# EAGLE board PCB v35 (EAGLE 9.7.0)
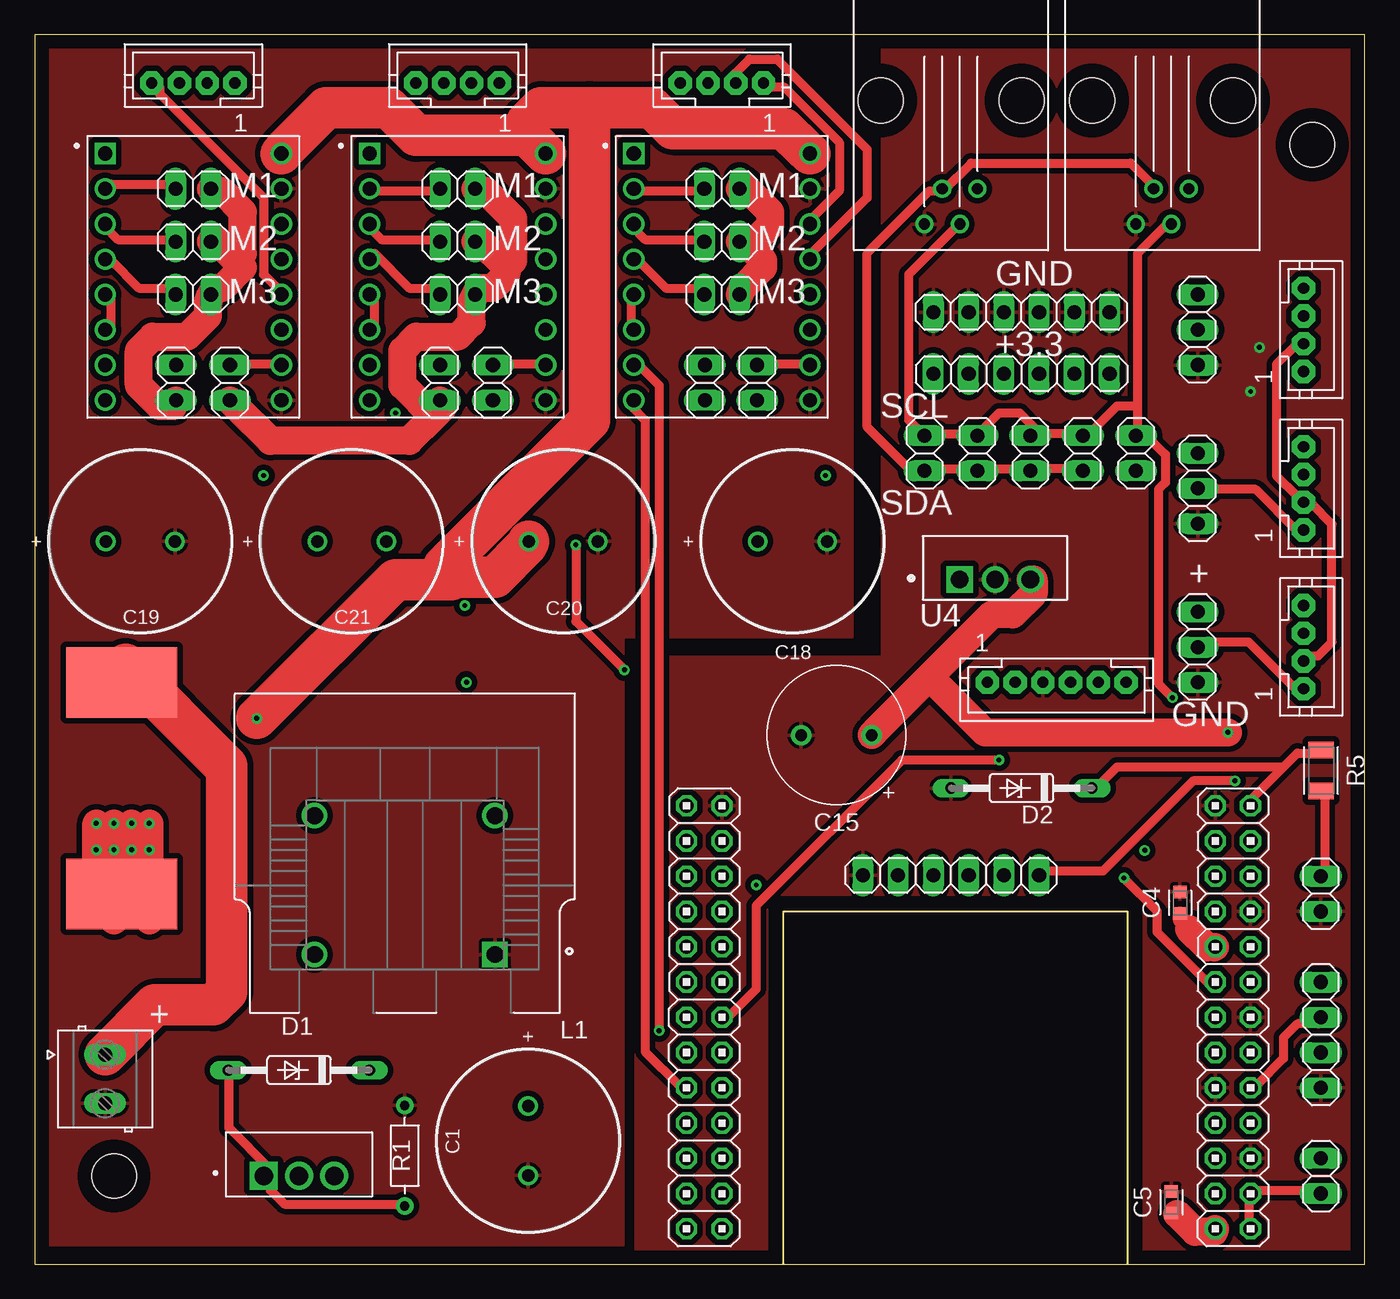
[diagram p0: board, top side]
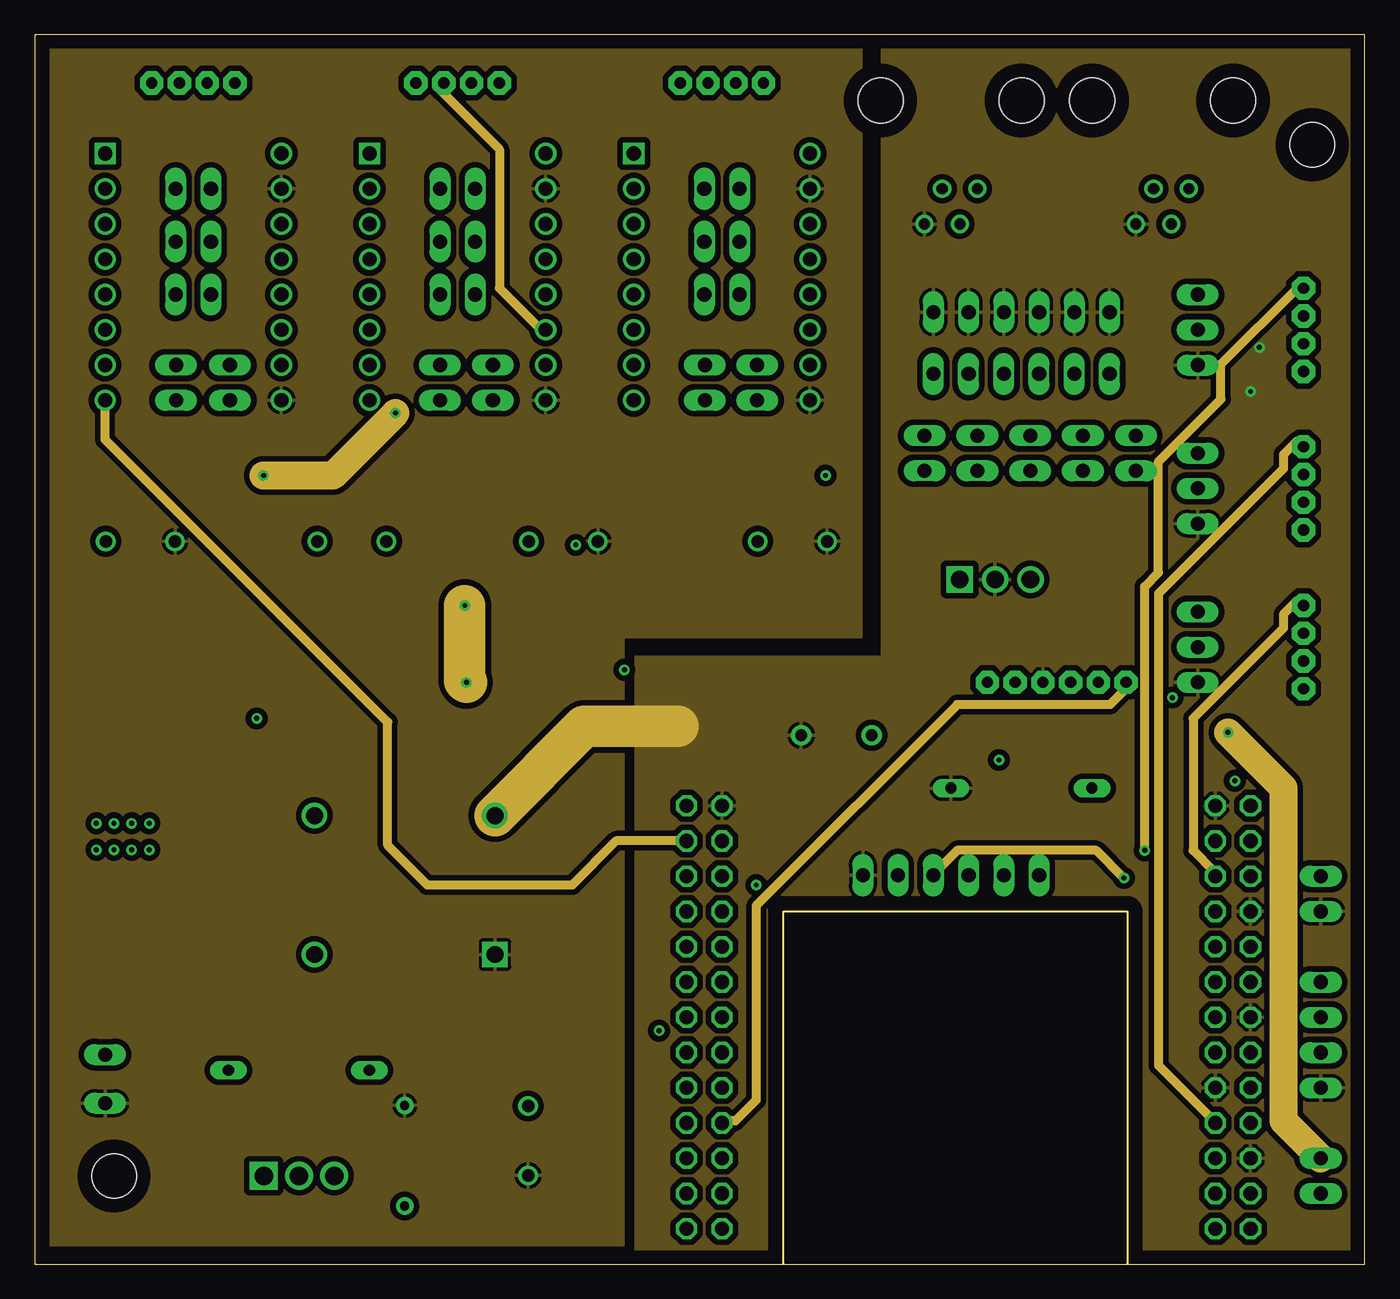
[diagram p1: board, inner layer Route2]
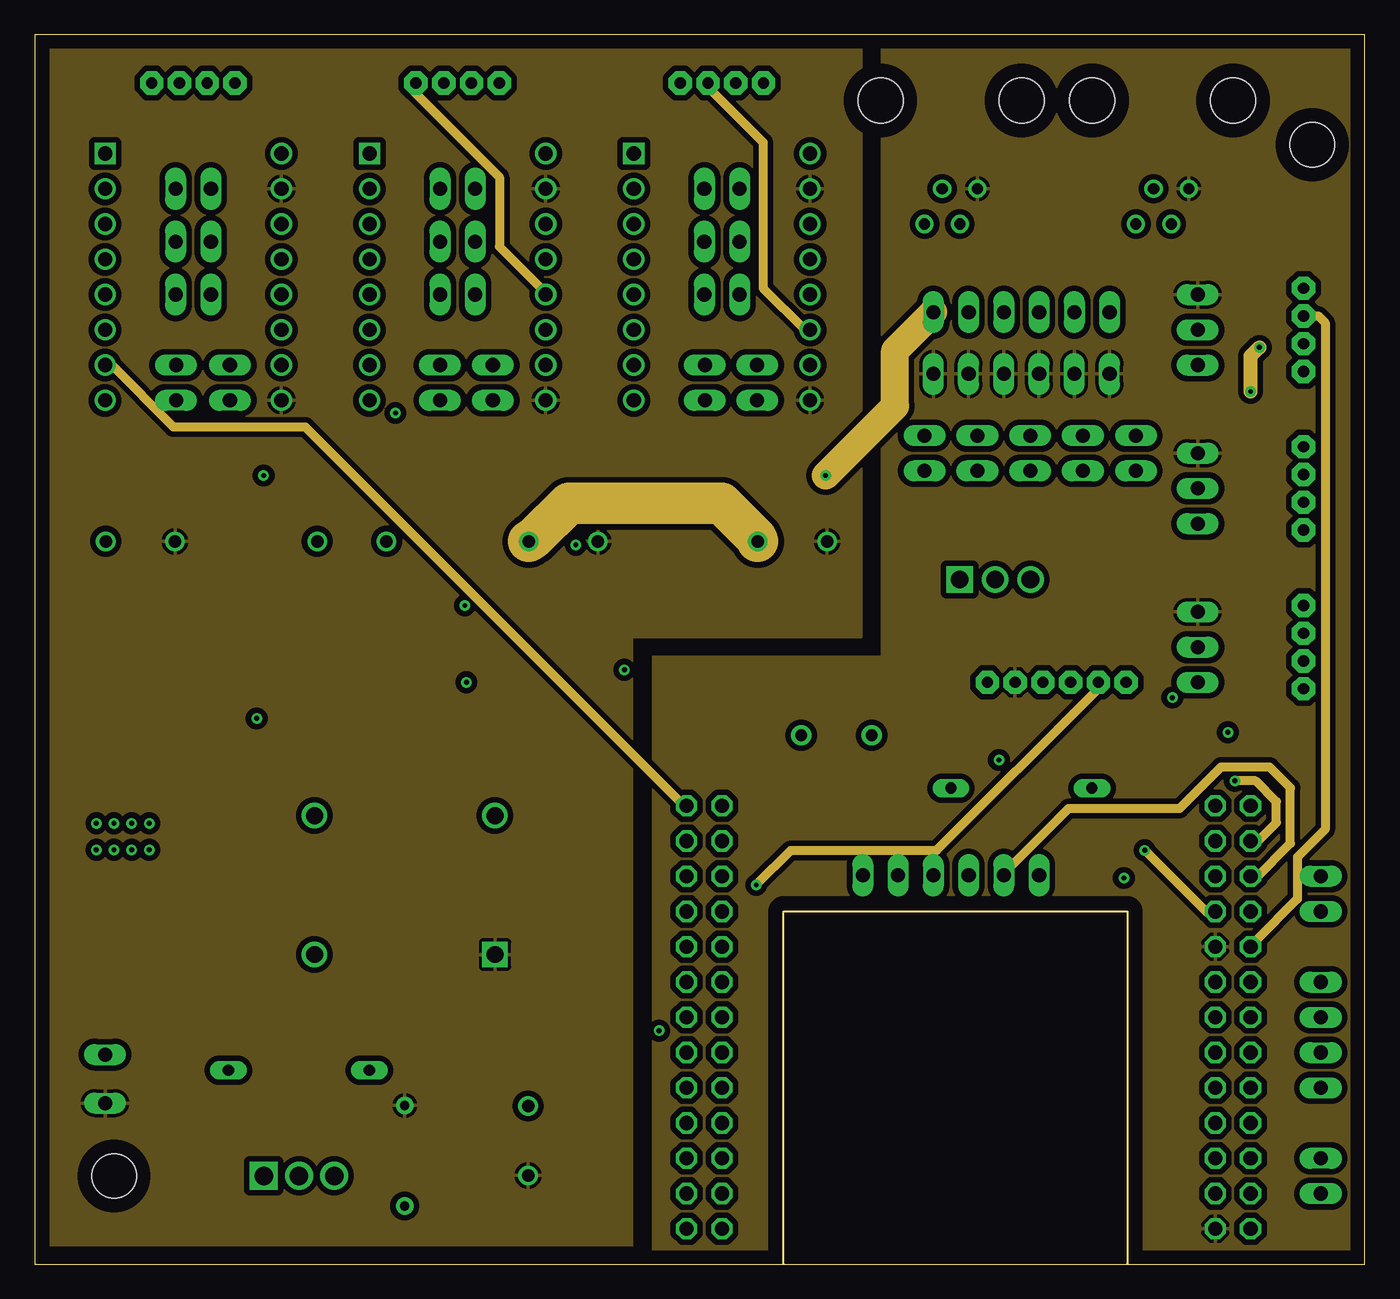
[diagram p2: board, inner layer Route15]
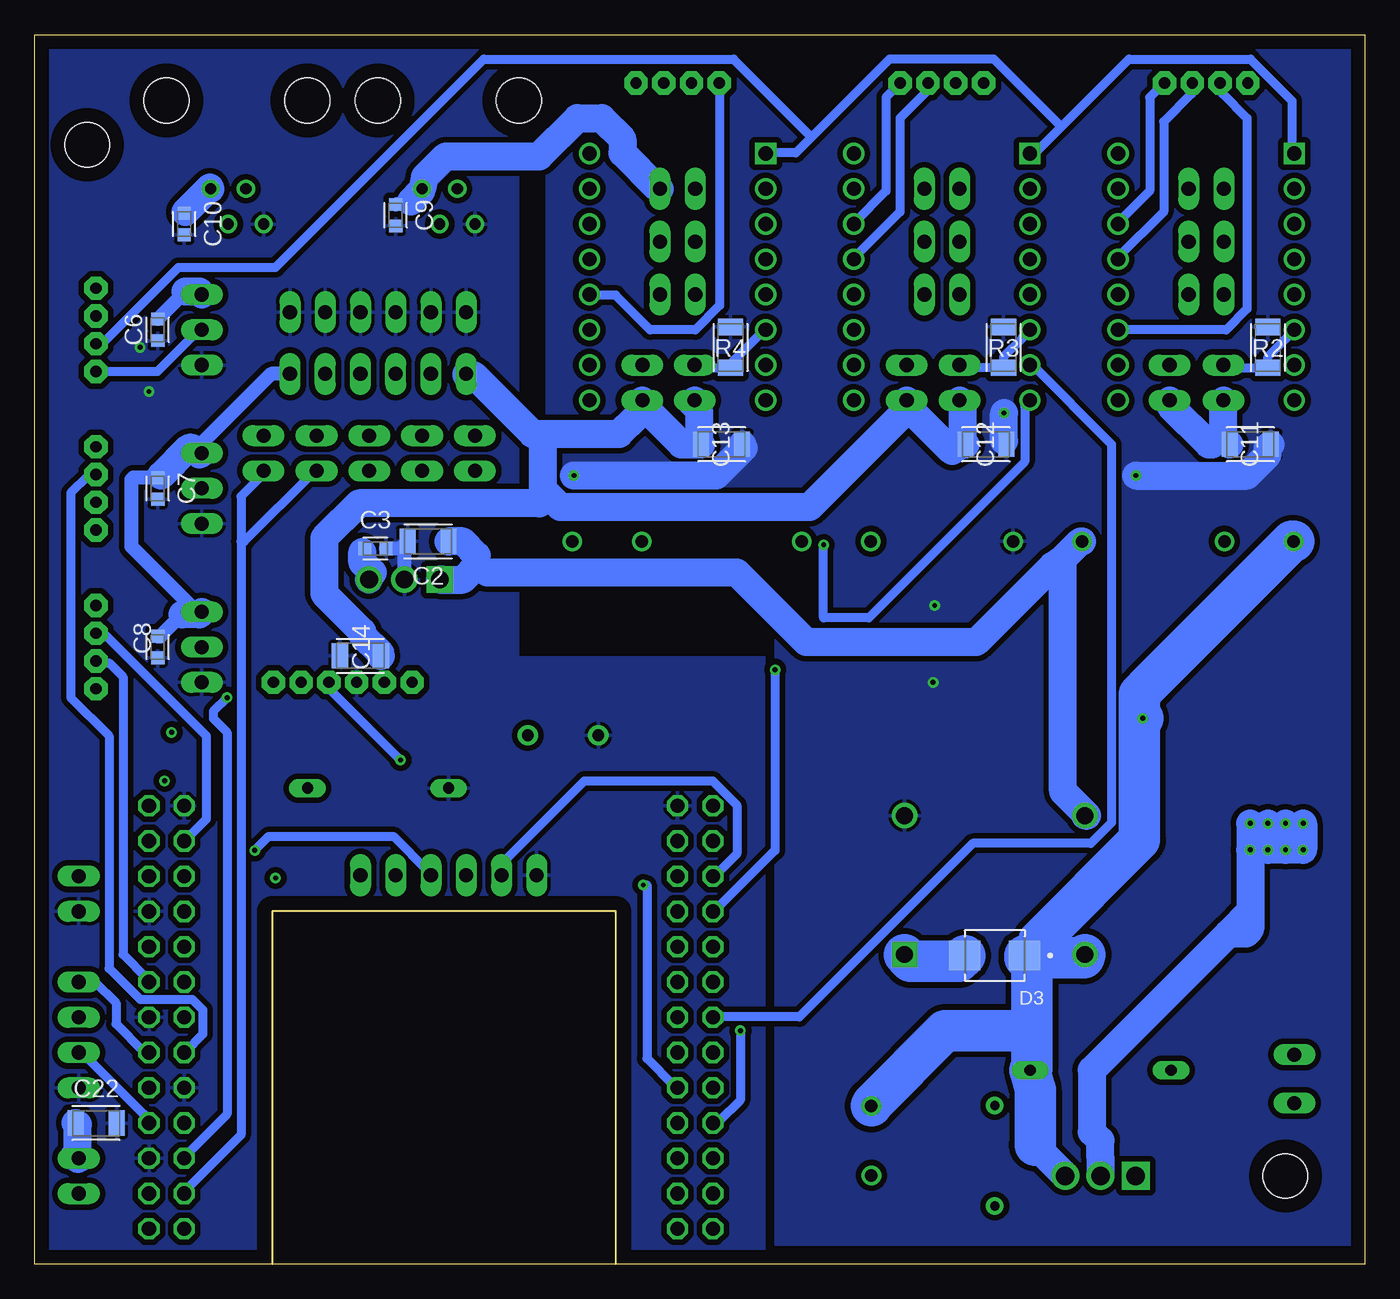
[diagram p3: board, bottom side, seen from below]

Size 95.86 x 88.57 mm. Coordinates in mm from the lower left corner, seen from the top.
Outline: 53.98,0 0,0 0,88.57 95.86,88.57 95.86,0 78.74,0
Outline: 53.98,0 78.74,0
Outline: 53.98,0 53.98,25.4 78.74,25.4 78.74,0
Copper layers (1+2*15+16): Top 0.035mm / dielectric 1.5mm / Route2 0.035mm / dielectric 0.15mm / Route15 0.035mm / dielectric 0.2mm / Bottom 0.035mm
Design rules "Fusion Electronics Design Rules *": minimum track width 6mil, minimum drill 0.35mm, track to track 6mil, track to pad 6mil, pad to pad 6mil, via to via 6mil, smd to smd 6mil, copper to edge 40mil, drill to drill 6mil, minimum pad ring 10mil, minimum via ring 8mil, stop-mask expansion 4mil, vias tented up to drill 0mil, thermal gap 10mil
Net classes: 0 default: width 0.318 mm; 1 power: width 2 mm; 2 lidlpower: width 1 mm
Holes 3.2 mm at 92.08,80.64 5.72,6.35

## Footprints (pad centres in the part's own frame; a part is rotated, then mirrored left to right if it is on the bottom)
WCAP-AT1H_13X20(DXL) = drill 0.9: 1 2.5,0; 2 -2.5,0
CAPC3216X135 = smd 1.165 x 1.815: 1 -1.475,0; 2 1.475,0
CAPC1608X85 = smd 0.921 x 0.97: 1 -0.775,0; 2 0.775,0
CAPPRD508W65D1000H1100B = drill 0.85 pad 1.45: 1 -2.54,0; 2 2.54,0
DO35Z10 = drill 0.813 long: A 5.08,0; C -5.08,0
DIOM4336X265N = smd 2.28 x 2.12: A 2.165,0; C -2.165,0
RJ11 = drill 0.8: 1 -3.81,-2.54; 2 -6.35,-1.27; 3 -3.81,0; 4 -6.35,1.27 | hole 3.25: 2.54,-5.715; 2.54,4.445
2X13 = drill 1.016 octagon: 1 -15.24,-1.27; 2 -15.24,1.27; 3 -12.7,-1.27; 4 -12.7,1.27; 5 -10.16,-1.27; 6 -10.16,1.27; 7 -7.62,-1.27; 8 -7.62,1.27; 9 -5.08,-1.27; 10 -5.08,1.27; 11 -2.54,-1.27; 12 -2.54,1.27; 13 0,-1.27; 14 0,1.27; 15 2.54,-1.27; 16 2.54,1.27; 17 5.08,-1.27; 18 5.08,1.27; 19 7.62,-1.27; 20 7.62,1.27; 21 10.16,-1.27; 22 10.16,1.27; 23 12.7,-1.27; 24 12.7,1.27; 25 15.24,-1.27; 26 15.24,1.27
1X02 = drill 1.016 long: 1 -1.27,0; 2 1.27,0
1X06 = drill 1.016 long: 1 -6.35,0; 2 -3.81,0; 3 -1.27,0; 4 1.27,0; 5 3.81,0; 6 6.35,0
1X03 = drill 1.016 long: 1 -2.54,0; 2 0,0; 3 2.54,0
1X04 = drill 1.016 long: 1 -3.81,0; 2 -1.27,0; 3 1.27,0; 4 3.81,0
IND_UT2020-001 = drill 1.219 square: 1 -6.502,5.004 | drill 1.219: 2 -6.502,-5.004; 3 6.502,-5.004; 4 6.502,5.004
JST-PH4 = drill 0.813 pad 1.676 octagon: 1 3,0; 2 1,0; 3 -1,0; 4 -3,0
JST-PH6 = drill 0.813 pad 1.676 octagon: 1 5,0; 2 3,0; 3 1,0; 4 -1,0; 5 -3,0; 6 -5,0
TO254P1052X465X1989-3 = drill 1.34 pad 2.01 square: 1 0,0 | drill 1.34 pad 2.01: 2 2.54,0; 3 5.08,0
RESAD724W46L381D178B = drill 0.66 pad 1.26: 1 -3.62,0; 2 3.62,0
RESC3216X70 = smd 1.165 x 1.815: 1 -1.475,0; 2 1.475,0
MODULE_A4988_STEPPER_MOTOR_DRIVER_CARRIER = drill 1.02 square: 1 -6.35,8.89 | drill 1.02: 2 -6.35,6.35; 3 -6.35,3.81; 4 -6.35,1.27; 5 -6.35,-1.27; 6 -6.35,-3.81; 7 -6.35,-6.35; 8 -6.35,-8.89; 9 6.35,-8.89; 10 6.35,-6.35; 11 6.35,-3.81; 12 6.35,-1.27; 13 6.35,1.27; 14 6.35,3.81; 15 6.35,6.35; 16 6.35,8.89
TO255P1040X460X2890-3 = drill 1.27 pad 1.91 square: 1 -2.55,-0.85 | drill 1.27 pad 1.91: 2 0,-0.85; 3 2.55,-0.85
POJ = smd 8 x 5.08: P$3 -1.27,7.62; P$4 -1.27,-7.62
DG350-3.5-02P = drill 1 long: 1 -1.75,0; 2 1.75,0

## Placement (x,y rotation side)
C1  3300 µF  [WCAP-AT1H_13X20(DXL)]  35.56,8.89 90 top
C2  [CAPC3216X135]  67.51,52.07 180 bottom
C3  [CAPC1608X85]  71.32,51.54 0 bottom
C4  [CAPC1608X85]  82.55,26.04 90 top
C5  [CAPC1608X85]  81.92,4.45 90 top
C6  [CAPC1608X85]  87,67.31 270 bottom
C7  [CAPC1608X85]  87,55.88 270 bottom
C8  [CAPC1608X85]  87,44.45 270 bottom
C9  [CAPC1608X85]  69.85,75.56 270 bottom
C10  [CAPC1608X85]  85.09,74.93 270 bottom
C11  [CAPC3216X135]  8.26,59.05 0 bottom
C12  [CAPC3216X135]  27.3,59.05 0 bottom
C13  [CAPC3216X135]  46.35,59.05 0 bottom
C14  [CAPC3216X135]  72.39,43.82 180 bottom
C15  [CAPPRD508W65D1000H1100B]  57.78,38.1 180 top
C18  2200 µF  [WCAP-AT1H_13X20(DXL)]  54.61,52.07 180 top
C19  2200 µF  [WCAP-AT1H_13X20(DXL)]  7.62,52.07 180 top
C20  2200 µF  [WCAP-AT1H_13X20(DXL)]  38.1,52.07 180 top
C21  3300 µF  [WCAP-AT1H_13X20(DXL)]  22.86,52.07 180 top
C22  [CAPC3216X135]  91.44,10.16 0 bottom
D1  BZX55  [DO35Z10]  19.05,13.97 180 top
D2  BZX55  [DO35Z10]  71.12,34.29 180 top
D3  SMBJ11A  [DIOM4336X265N]  26.67,22.22 180 bottom
J1  RJ11  [RJ11]  80.64,81.28 90 top
J3  RJ11  [RJ11]  65.41,81.28 90 top
JP1  [2X13]  48.26,17.78 270 top
JP2  [2X13]  86.36,17.78 270 top
JP3  [1X02]  64.14,58.42 90 top
JP4  [1X02]  67.94,58.42 90 top
JP5  [1X02]  71.75,58.42 90 top
JP6  [1X02]  75.54,58.42 90 top
JP7  [1X02]  79.38,58.42 90 top
JP8  [1X02]  49.53,77.47 180 top
JP9  [1X02]  49.53,73.66 180 top
JP10  [1X02]  49.53,69.85 180 top
JP11  [1X02]  11.43,77.47 180 top
JP12  [1X02]  11.43,73.66 180 top
JP13  [1X02]  11.43,69.85 180 top
JP14  [1X02]  30.48,77.47 180 top
JP15  [1X02]  30.48,73.66 180 top
JP16  [1X02]  30.48,69.85 180 top
JP17  [1X06]  71.12,68.58 180 top
JP18  [1X06]  71.12,64.14 0 top
JP19  [1X03]  83.82,67.31 270 top
JP20  [1X02]  92.69,26.67 270 top
JP21  [1X03]  83.82,55.88 270 top
JP22  [1X06]  66.04,28.02 180 top
JP23  [1X03]  83.82,44.45 270 top
JP27  [1X02]  52.07,63.5 90 top
JP28  [1X02]  14.07,63.5 90 top
JP29  [1X02]  33.02,63.5 90 top
JP30  [1X02]  10.19,63.5 90 top
JP31  [1X02]  29.21,63.5 90 top
JP32  [1X02]  48.3,63.5 90 top
JP33  [1X04]  92.69,16.51 270 top
JP34  [1X02]  92.69,6.35 90 top
L1  UT2020-001  [IND_UT2020-001]  26.67,27.3 180 top
P1  [JST-PH4]  49.53,85.09 0 top
P2  [JST-PH4]  11.43,85.09 0 top
P3  [JST-PH4]  30.48,85.09 0 top
P4  [JST-PH4]  91.44,67.31 270 top
P5  [JST-PH4]  91.44,55.88 270 top
P6  [JST-PH4]  91.44,44.45 270 top
P8  [JST-PH6]  73.66,41.91 180 top
Q1  IRF9540NPBF  [TO254P1052X465X1989-3]  16.51,6.35 0 top
R1  [RESAD724W46L381D178B]  26.67,7.81 270 top
R2  [RESC3216X70]  6.99,66.04 90 bottom
R3  [RESC3216X70]  26.04,66.04 90 bottom
R4  [RESC3216X70]  45.72,66.04 90 bottom
R5  [RESC3216X70]  92.71,35.56 270 top
U1  A4988_STEPPER_MOTOR_DRIVER_CARRIER  [MODULE_A4988_STEPPER_MOTOR_DRIVER_CARRIER]  49.53,71.12 0 top
U2  A4988_STEPPER_MOTOR_DRIVER_CARRIER  [MODULE_A4988_STEPPER_MOTOR_DRIVER_CARRIER]  11.43,71.12 0 top
U3  A4988_STEPPER_MOTOR_DRIVER_CARRIER  [MODULE_A4988_STEPPER_MOTOR_DRIVER_CARRIER]  30.48,71.12 0 top
U4  L7805CV-DG  [TO255P1040X460X2890-3]  69.22,50.16 0 top
U$1  POJ  [POJ]  7.56,34.29 0 top
X1  DG3XX-02-3.5  [DG350-3.5-02P]  5.08,13.34 270 top

## Library data of the parts
C1 C18-C21 = Wurth_Capacitors_WCAP-AT1H; DATASHEET-URL: https://www.we-online.com/catalog/datasheet/860240278009.pdf; DF: 19%; DIAMETER: 13mm; I-LEAK: 220uA; I-RIPPLE: 1540mA; L: 20mm; OPERATING-TEMPERATURE: -40 °C up to +105 °C; PART-NUMBER: 860240278009; PITCH: 5mm; TECHNICAL-REFERENCE: ATDI200222M010DSPACK000; VR: 10V(DC)
C2-C15 C22 = Capacitor; CATEGORY: Capacitor
D1 D2 = diode
D3 = SMBJ11A; AVAILABILITY: In Stock; CHECK_PRICES: https://www.snapeda.com/parts/SMBJ11A/taiwan/view-part/?ref=eda; DESCRIPTION: 600W, 12.9V, 5%, Unidirectional, TVS; MF: Taiwan Semiconductor; MP: SMBJ11A; PACKAGE: SMD-2 Taiwan Semiconductor; PRICE: None; SNAPEDA_LINK: https://www.snapeda.com/parts/SMBJ11A/taiwan/view-part/?ref=snap
J1 J3 = con-rj
JP1-JP23 JP27-JP34 = pinhead
L1 = UT2020-001; AVAILABILITY: In Stock; CHECK_PRICES: https://www.snapeda.com/parts/UT2020-001/Triad+Magnetics/view-part/?ref=eda; DESCRIPTION: 9 mH @ 10 kHz 2 Line Common Mode Choke Through Hole 500mA DCR 1.4Ohm; MF: Triad Magnetics; MP: UT2020-001; PACKAGE: Horizontal-4 Triad Magnetics; PRICE: None; SNAPEDA_LINK: https://www.snapeda.com/parts/UT2020-001/Triad+Magnetics/view-part/?ref=snap
P1-P6 P8 = jst-ph
Q1 = IRF9540NPBF; AVAILABILITY: In Stock; CHECK_PRICES: https://www.snapeda.com/parts/IRF9540NPBF/Infineon/view-part/?ref=eda; DESCRIPTION: Power MOSFET,P-Ch,VDSS -100V,RDS(ON) 0.117Ohm,ID -23A,TO-220AB,PD 140W,VGS+/-20V | Infineon IRF9540NPBF; MF: Infineon Technologies; MP: IRF9540NPBF; PACKAGE: TO-220 Infineon; PRICE: None; SNAPEDA_LINK: https://www.snapeda.com/parts/IRF9540NPBF/Infineon/view-part/?ref=snap
R1-R5 = Resistor; CATEGORY: Resistor; SUB-CATEGORY: Fixed
U1-U3 = A4988_STEPPER_MOTOR_DRIVER_CARRIER; AVAILABILITY: Not in stock; CHECK_PRICES: https://www.snapeda.com/parts/A4988%20STEPPER%20MOTOR%20DRIVER%20CARRIER/Pololu/view-part/?ref=eda; DESCRIPTION: Stepper Motor Driver; MF: Pololu; MP: A4988 STEPPER MOTOR DRIVER CARRIER; PACKAGE: None; PRICE: None; SNAPEDA_LINK: https://www.snapeda.com/parts/A4988%20STEPPER%20MOTOR%20DRIVER%20CARRIER/Pololu/view-part/?ref=snap
U4 = L7805CV-DG; AVAILABILITY: In Stock; CHECK_PRICES: https://www.snapeda.com/parts/L7805CV-DG/STMicroelectronics/view-part/?ref=eda; DESCRIPTION: Linear Voltage Regulator IC Positive Fixed 1 Output 1.5A TO-220; MF: STMicroelectronics; MP: L7805CV-DG; PACKAGE: TO-220 STMicroelectronics; PRICE: None; SNAPEDA_LINK: https://www.snapeda.com/parts/L7805CV-DG/STMicroelectronics/view-part/?ref=snap
U$1 = Library
X1 = degson

## Nets
15: JP2.15 P5.3
16: JP2.13
17: JP2.11 JP22.4
54: JP2.5 P6.4
55: JP2.7 JP22.3 P4.4
56: JP2.3 P6.3
57: JP2.4 JP22.1
68: JP2.19 P5.4
69: JP2.16 JP33.1
70: JP1.19 U1.7
71: JP2.6 JP22.2
72: JP1.20 P8.6
73: JP2.10 P4.3
74: JP2.12 P4.2 P5.2 P6.2 U1.1 U2.1 U3.1
75: JP1.17 U1.8
76: JP1.18 P8.5
77: JP1.1 U2.7
78: JP1.3 U2.8
79: JP1.5 JP22.5
80: JP1.7 U3.8
108: JP1.13 U3.7
109: JP1.14 P8.4
+3.3 [lidlpower]: C4.1 C5.1 C6.1 C7.1 C8.1 C9.1 C10.1 C11.1 C12.1 C13.1 C14.1 J1.1 J3.1 JP2.9 JP2.25 JP8.1 JP9.1 JP10.1 JP11.1 JP12.1 JP13.1 JP14.1 JP15.1 JP16.1 JP18.1 JP18.2 JP18.3 JP18.4 JP18.5 JP18.6 JP19.1 JP21.1 JP23.1 JP27.1 JP28.1 JP29.1 JP30.1 JP31.1 JP32.1 P8.2
+5 [lidlpower]: C3.1 C15.1 C22.1 JP34.2 U4.3
+12POW [power]: C1.1 C18.1 C19.1 C20.1 D1.C D3.C L1.4 Q1.3 U1.16 U2.16 U3.16
ADC_IN: JP20.1 R5.2
ADC_KEY: JP1.4
GND [lidlpower]: C2.2 C3.2 C4.2 C5.2 C6.2 C7.2 C8.2 C9.2 C10.2 C11.2 C12.2 C13.2 C14.2 C15.2 C21.2 C22.2 D2.A J1.4 J3.4 JP1.2 JP2.1 JP2.8 JP2.14 JP2.17 JP2.22 JP17.1 JP17.2 JP17.3 JP17.4 JP17.5 JP17.6 JP19.3 JP20.2 JP21.3 JP22.6 JP23.3 JP33.4 L1.2 P8.3 R2.2 R3.2 R4.2 U4.2
GNDPOW [power]: C1.2 C18.2 C19.2 C20.2 D3.A L1.1 R1.1 U1.9 U1.15 U2.9 U2.15 U3.9 U3.15 X1.2
N$1: JP8.2 U1.2
N$2: P1.4 U1.12
N$3: P1.3 U1.11
N$4: P1.2 U1.13
N$5: JP1.9
N$6: JP1.11
N$7: P1.1 U1.14
N$8: JP1.15
N$9: P2.4 U2.12
N$10: P2.3 U2.11
N$11: JP1.21
N$12: JP1.23
N$13: JP1.25
N$14: P2.2 U2.13
N$15: P2.1 U2.14
N$16: JP1.6
N$17: JP1.8
N$18: JP1.10
N$19: JP1.12
N$20: P3.4 U3.12
N$21: JP1.16
N$22: P3.3 U3.11
N$23: P3.2 U3.13
N$24: JP1.22
N$25: JP1.24
N$26: JP1.26
N$27: P3.1 U3.14
N$28: JP9.2 U1.3
N$29: JP10.2 U1.4
N$30: JP11.2 U2.2
N$31: JP12.2 U2.3
N$32: JP13.2 U2.4
N$33: JP14.2 U3.2
N$34: JP15.2 U3.3
N$35: JP16.2 U3.4
N$36: JP2.24 JP2.26 JP34.1
N$37: JP30.2 R2.1 U2.5 U2.6
N$38: JP31.2 R3.1 U3.5 U3.6
N$40: D1.A Q1.1 R1.2
N$42: JP27.2 U1.10
N$44: D2.C JP2.2 R5.1
N$46: JP29.2 U3.10
N$47: JP19.2 P4.1
N$48: JP28.2 U2.10
N$51: JP21.2 P5.1
N$55: JP23.2 P6.1
N$67: JP32.2 R4.1 U1.5 U1.6
P [power]: U$1.P$3 X1.1
P1 [power]: Q1.2 U$1.P$4
P2 [lidlpower]: C2.1 C21.1 L1.3 U4.1
RX0_64: JP2.18 JP33.2
SCL1_12: J1.2 J3.2 JP2.21 JP3.2 JP4.2 JP5.2 JP6.2 JP7.2
SDA1_11: J1.3 J3.3 JP2.23 JP3.1 JP4.1 JP5.1 JP6.1 JP7.1
TX0_65: JP2.20 JP33.3

## Tracks (layer width: path | path; a pad name or v marks a point on that pad's centre or on a via)
15
  Bottom 0.635: JP2.15 85,15.31 83.75,16.56 83.75,18.31 84.5,19.06 88.25,19.06 90.5,21.31 90.5,38.06 93.25,40.81 93.25,55.56 92,56.81 91.5,56.81 P5.3
17  (via drill 0.35)
  Top 0.635: JP2.11 85,20.31 84.5,20.31 80.89,23.91 80.89,25.41 v78.5,27.81
  Route2 0.635: v78.5,27.81 76.5,29.81 66.5,29.81 65,28.31 JP22.4
54
  Route2 0.635: JP2.5 85,28.31 83.5,29.81 83.5,39.31 90,45.81 90,46.81 91,47.81 P6.4
55  (via drill 0.35)
  Route2 0.635: v80,29.81 80,48.81 81,49.81 81,57.81 85.5,62.31 85.5,64.81 91,70.31 P4.4
  Route15 0.635: v80,29.81 84.5,25.31 85,25.31 JP2.7
  Bottom 0.635: v80,29.81 79,30.81 70,30.81 67.5,28.31 JP22.3
56
  Bottom 0.635: JP2.3 85,30.56 83.5,32.06 83.5,38.06 90.75,45.31 91.25,45.31 P6.3
57  (via drill 0.35)
  Top 0.635: v86.5,34.81 83.5,34.81 77,28.31 72.5,28.31 JP22.1
  Route15 0.635: v86.5,34.81 88,34.81 89.5,33.31 89.5,31.81 88,30.31 JP2.4
68
  Route2 0.635: JP2.19 85,10.31 81,14.31 81,48.31 90,57.31 90,58.31 91,59.31 P5.4
69
  Bottom 0.635: JP2.16 88,15.31 90,17.31 90,18.81 91.5,20.31 92.5,20.31 JP33.1
70  (via drill 0.35)
  Top 0.635: v45,16.81 45,63.31 43.5,64.81 U1.7
  Bottom 0.635: v45,16.81 45,11.81 46.5,10.31 JP1.19
71
  Route15 0.635: JP22.2 70,28.31 74.5,32.81 82.5,32.81 85.5,35.81 89,35.81 90.5,34.31 90.5,30.31 88,27.81 JP2.6
72
  Route2 0.635: JP1.20 50,10.31 50.5,10.31 52,11.81 52,25.81 66.5,40.31 77.5,40.31 79,41.81 P8.6
73
  Route15 0.635: P4.3 92.5,68.31 93,67.81 93,31.31 91,29.31 91,26.31 88,23.31 JP2.10
74
  Top 0.635: P4.2 91,66.31 89.5,64.81 89.5,56.81 91,55.31 P5.2 91.5,54.81 92,54.81 93.5,53.31 93.5,44.81 92.5,43.81 91.5,43.81 P6.2
  Bottom 0.635: 21.88,81.94 24,79.81 U3.1 | 21.88,81.94 17,86.81 8.25,86.81 5.25,83.81 5.25,80.06 U2.1 | 39.88,81.19 34.25,86.81 26.75,86.81 21.88,81.94 | 39.88,81.19 41,80.06 43,80.06 U1.1 | JP2.12 87.75,20.56 89.5,22.31 89.5,42.31 90.5,43.31 91.25,43.31 P6.2 | 39.88,81.19 45.5,86.81 63.5,86.81 78.5,71.81 85.5,71.81 91,66.31 P4.2
75
  Top 0.635: JP1.17 46.5,12.81 44,15.31 44,60.81 43,61.81 U1.8
76  (via drill 0.35)
  Route15 0.635: v52,27.31 54.5,29.81 65,29.81 76.5,41.31 76.5,41.81 P8.5
  Bottom 0.635: JP1.18 49.75,12.81 51.75,14.81 51.75,27.31 v52,27.31
77
  Route15 0.635: JP1.1 46.5,33.31 19.5,60.31 10,60.31 5.5,64.81 U2.7
78
  Route2 0.635: U2.8 5.08,59.41 25.44,39.05 25.44,30.17 28.31,27.3 38.73,27.3 41.91,30.48 JP1.3
79
  Bottom 0.635: JP1.5 46.75,28.06 45.25,29.56 45.25,33.06 47,34.81 56.25,34.81 62,29.06 62,28.06 JP22.5
80  (via drill 0.35)
  Top 0.635: v42.5,42.81 39,46.31 v39,51.81
  Bottom 0.635: U3.8 24.25,62.06 24.5,61.81 24.5,57.81 35.75,46.56 39,46.56 v39,51.81 | v42.5,42.81 42.5,29.81 46.5,25.81 JP1.7
108
  Bottom 0.635: JP1.13 46.75,17.81 40.75,17.81 28.25,30.31 19.75,30.31 18.25,31.81 18.25,59.06 24,64.81 U3.7
109  (via drill 0.35)
  Top 0.635: v69.5,36.31 62.5,36.31 52,25.81 52,19.81 50,17.81 JP1.14
  Bottom 0.635: v69.5,36.31 75,41.81 P8.4
+3.3
  Top 1: 83.18,24.13 82.55,24.76 C4.1 | 82.34,3.61 82.28,3.67 C5.1
  Top 2: 34,71.81 34,71.31 33,70.31 32,70.31 JP16.1 31.5,69.31 31.5,67.81 30.5,66.81 27.5,66.81 26.5,65.81 26.5,63.31 28.75,61.06 | 34,71.81 32,73.81 JP15.1 | JP14.1 32,77.31 32.5,77.31 34.5,75.31 34.5,72.31 34,71.81 | 14.5,72.31 13,73.81 JP12.1 | 14.5,72.31 15,71.81 13.5,70.31 13,70.31 JP13.1 12.5,69.31 12.5,68.31 11,66.81 8.5,66.81 7.5,65.81 7.5,63.31 9,61.81 10,61.81 JP30.1 | JP11.1 13,77.31 13.5,77.31 15,75.81 15,72.81 14.5,72.31 | 51.5,73.31 51,73.81 JP9.1 | 51.5,73.31 52.5,72.31 52.5,71.81 51,70.31 JP10.1 | JP2.25 85,2.31 83.64,2.31 82.34,3.61 | 83.18,24.13 84.5,22.81 85,22.81 JP2.9 | 51.5,73.31 53,74.81 53,75.81 51,77.81 JP8.1 | 28.75,61.06 29.5,61.81 JP31.1 | 28.75,61.06 27,59.31 17,59.31 14.5,61.81 JP28.1
  Bottom 1: JP18.6 78.81,64.14 84.32,58.63 | C7.1 88.76,56.66 88.9,56.52 88.9,51.71 84,46.81 | 85,70.06 85.02,70.06 C6.1 | C8.1 86.81,45.23 85.23,46.81 | 68.75,76.56 68.97,76.34 C9.1 | C10.1 85,75.8 85,75.81
  Bottom 2: 10.25,59.56 9.75,59.06 C11.1 | 10.25,59.56 10.25,62.06 JP30.1 | JP28.1 14,62.06 14,61.81 11.25,59.06 11,59.06 10.25,59.56 | 29,59.06 29,62.06 JP31.1 | 29,59.06 C12.1 | 33,61.81 33,62.06 JP29.1 | 33,61.81 29.75,58.56 29,59.06 | 48,59.06 48,61.56 48.5,62.06 JP32.1 | 48,59.06 C13.1 | 52,61.81 52,62.06 JP27.1 | 52,61.81 49.25,59.06 48,59.06 | JP23.1 84,46.81 85.23,46.81 | 86.75,56.81 84.75,58.81 84.5,58.81 84.32,58.63 84,58.31 JP21.1 | 68.75,76.56 68,77.31 J3.1 67.75,78.31 66.25,79.81 59.5,79.81 56.75,82.56 55,82.56 53.5,81.06 53.5,80.06 51,77.56 JP8.1 | 85,70.06 84,70.06 JP19.1 | 85,75.81 83.25,77.56 J1.1 | C14.1 71,44.06 72.25,45.31 72.25,45.56 75,48.31 75,52.31 72.5,54.81 59.5,54.81 58.88,55.44 | 59.25,59.81 60,59.81 64.25,64.06 64.75,64.06 JP18.1 | 59.25,59.81 53.75,59.81 52.5,61.06 52,61.81 | 58.88,55.44 59.25,55.81 59.25,59.81 | 58.88,55.44 58,54.56 40,54.56 33.5,61.06 33,61.81
  pour Route15 (isolate 0.406): 61.02,43.77 61,43.75 60.98,43.74 44.53,43.74 44.53,0.08 95.81,0.08 95.81,88.19 61.04,88.19 61.04,43.8
+5  (via drill 0.35)
  Top 2: 64.5,42.31 69,46.81 70.5,46.81 72,48.31 72,49.31 U4.3 | 64.5,42.31 60.5,38.31 C15.1 | v86,38.31 68.5,38.31 64.5,42.31
  Route2 2: JP34.2 90,10.31 90,34.31 v86,38.31
  Bottom 1: C3.1 72.25,51.38 72.25,50.56
  Bottom 2: C22.1 92.75,10.06 92.75,8.06 93,7.81 92.75,7.56 JP34.2 | 72.25,51.31 72.25,50.56 71.5,49.81 71.75,49.56 U4.3
+12POW  (via drill 0.35)
  Top 3: 35.5,81.31 27.5,81.31 25.5,83.31 21,83.31 18,80.31 U2.16 | 35.5,81.31 36.5,80.31 U3.16 | 40,83.31 36.5,83.31 35.5,82.31 35.5,81.31 | 40,83.31 44.5,83.31 46,81.81 54,81.81 55.5,80.31 U1.16 | 29.5,49.31 26,49.31 v16,39.31 | C20.1 35.5,51.81 33.17,49.48 30.16,49.48 29.99,49.31 29.5,49.31 | 40,83.31 40,60.81 29.5,50.31 29.5,49.31
  Route15 3: C18.1 52,52.31 49.5,54.81 38.5,54.81 36,52.31 C20.1
  Bottom 2: 23.75,8.56 23.75,8.51 Q1.3
  Bottom 3: 23.5,22.06 20.25,22.06 L1.4 | 23.5,22.06 24,22.06 | 24,22.06 24.5,22.06 D3.C | 24,22.06 24,16.81 | 24,16.81 24,14.06 D1.C 23.75,12.56 23.75,8.56 | 24,16.81 30.25,16.81 35.5,11.56 C1.1 | 16.25,39.31 16.25,30.56 23.5,23.31 23.5,22.06 | 16.25,39.31 16.25,41.06 15.38,41.94 5.25,52.06 C19.1 | v16,39.31 16.25,39.31
ADC_IN
  Top 0.635: R5.2 93,33.81 93,28.31 JP20.1
GND  (via drill 0.35)
  Route2 2: v16.5,56.81 21.5,56.81 v26,61.31
  Route2 3: L1.2 39.6,38.73 46.35,38.73 | v31,47.45 31,42.03 v31.11,41.91
  Route15 1: v88.27,66.04 87.63,65.41 v87.63,62.87
  Route15 2: JP17.6 62,65.81 62,61.81 v57,56.81
  Bottom 0.635: 70.5,51.56 C3.2 | C2.2 | 69.25,49.56 U4.2 | 33,32.81 33,32.31 L1.2
  Bottom 1: U4.2 69.22,51.84 C2.2 69.52,51.54 C3.2
  Bottom 2: v57,56.81 46.75,56.81 44.75,58.81 C13.2 | v16.5,56.81 8.5,56.81 7,58.31 7,58.81 C11.2 | 26,59.31 v26,61.31
  pour Route2 (isolate 0.406): 61.02,43.77 61,43.75 60.98,43.74 43.26,43.74 43.26,0.08 95.81,0.08 95.81,88.19 61.04,88.19 61.04,43.8
  pour Bottom (isolate 0.406): 61.02,43.77 61,43.75 60.98,43.74 43.26,43.74 43.26,0.08 95.17,0.08 95.17,88.19 61.04,88.19 61.04,43.8
  pour Bottom (isolate 0.406): 42.5,45.15 42.53,45.16 58.98,45.16 58.98,88.19 0.08,88.19 0.08,1.35 42.47,1.35 42.47,45.1 42.48,45.13
  pour Top (isolate 0.406): 61.02,43.77 61,43.75 60.98,43.74 43.26,43.74 43.26,0.08 95.81,0.08 95.81,88.19 61.04,88.19 61.04,43.8
GNDPOW
  Bottom 3: D3.A 29.25,21.81 32.75,21.81 33,22.06 L1.1
  pour Top (isolate 0.406): 42.5,45.15 42.53,45.16 58.98,45.16 58.98,88.19 0.08,88.19 0.08,1.35 42.47,1.35 42.47,45.1 42.48,45.13
  pour Route15 (isolate 0.406): 43.14,45.15 43.16,45.16 59.61,45.16 59.61,88.19 0.71,88.19 0.71,1.35 43.1,1.35 43.1,45.1 43.12,45.13
  pour Route2 (isolate 0.406): 42.5,45.15 42.53,45.16 59.61,45.16 59.61,88.19 0.71,88.19 0.71,1.35 42.47,1.35 42.47,45.1 42.48,45.13
N$1
  Top 0.635: JP8.2 48,77.31 43.5,77.31 U1.2
N$2
  Bottom 0.635: U1.12 55.75,69.81 54,69.81 51.5,67.31 48.25,67.31 46.5,69.06 46.5,85.06 P1.4
N$3
  Route15 0.635: U1.11 55.5,67.31 52.5,70.31 52.5,80.81 48.5,84.81 P1.3
N$4
  Top 0.635: U1.13 56,72.81 60,76.81 60,80.31 53.5,86.81 51.5,86.81 50.5,85.81 50.5,85.31 P1.2
N$7
  Top 0.635: U1.14 56,75.31 58,77.31 58,80.81 54,84.81 53,84.81 P1.1
N$9
  Top 0.635: U2.12 17.5,70.31 16.5,71.31 16.5,76.81 9,84.31 9,84.81 8.5,85.31 P2.4
N$10
  Bottom 0.635: U2.11 10,67.31 8.5,68.81 8.5,82.56 10.25,84.31 10.25,85.06 P2.3
N$14
  Bottom 0.635: U2.13 17.75,72.56 14.5,75.81 14.5,82.31 12.5,84.31 12.5,85.06 P2.2
N$15
  Bottom 0.635: U2.14 17.75,75.06 15.5,77.31 15.5,84.06 14.5,85.06 P2.1
N$20
  Route15 0.635: U3.12 36.5,70.31 33.5,73.31 33.5,78.31 27,84.81 P3.4
N$22
  Route2 0.635: U3.11 36.5,67.31 33.5,70.31 33.5,80.31 29,84.81 P3.3
N$23
  Bottom 0.635: U3.13 36.75,72.56 33.5,75.81 33.5,82.56 31.5,84.56 31.5,85.06 P3.2
N$27
  Bottom 0.635: U3.14 36.75,75.06 34.5,77.31 34.5,84.06 33.5,85.06 P3.1
N$28
  Top 0.635: JP9.2 48,73.81 44,73.81 43,74.81 U1.3
N$29
  Top 0.635: JP10.2 48,70.31 45.5,70.31 43.5,72.31 U1.4
N$30
  Top 0.635: JP11.2 10,77.81 5.5,77.81 U2.2
N$31
  Top 0.635: JP12.2 10,73.81 6,73.81 5,74.81 U2.3
N$32
  Top 0.635: JP13.2 10,70.31 7.5,70.31 5.5,72.31 U2.4
N$33
  Top 0.635: JP14.2 29,77.31 24.5,77.31 U3.2
N$34
  Top 0.635: JP15.2 29,73.81 25,73.81 24,74.81 U3.3
N$35
  Top 0.635: JP16.2 29,70.31 27,70.31 24.5,72.81 U3.4
N$36
  Top 0.635: JP2.26 87.5,2.81 87.5,4.81 JP2.24 88,5.31 92.5,5.31 JP34.1
N$37
  Top 0.635: U2.5 5.5,69.81 5.5,67.31 U2.6
  Bottom 0.635: JP30.2 10,64.56 7.12,64.56 R2.1 6.99,65.36 5.61,66.74 5.61,66.78 U2.6
N$38
  Top 0.635: U3.5 24.5,69.81 24.5,67.31 U3.6
  Bottom 0.635: JP31.2 29,64.56 26.11,64.56 R3.1 26.04,65.36 24.66,66.74 24.66,66.78 U3.6
N$40
  Top 0.635: R1.2 26.5,4.31 18,4.31 17,5.31 17,6.31 Q1.1 17,6.81 14,9.81 14,13.81 D1.A
N$42
  Top 0.635: JP27.2 52.5,64.81 55.5,64.81 U1.10
N$44
  Top 0.635: 90,35.81 87.5,33.31 JP2.2 | 90,35.81 91,36.81 92.5,36.81 R5.1 | 90,35.81 78,35.81 76.5,34.31 D2.C
N$46
  Top 0.635: JP29.2 33.5,64.81 36.5,64.81 U3.10
N$47
  Bottom 0.635: P4.1 87,64.31 84,67.31 JP19.2
N$48
  Top 0.635: JP28.2 14.5,64.81 17.5,64.81 U2.10
N$51
  Top 0.635: JP21.2 84,55.81 88,55.81 91,52.81 P5.1
N$55
  Top 0.635: JP23.2 84,44.81 87.5,44.81 91,41.31 P6.1
N$67
  Top 0.635: U1.5 43,69.81 43,67.31 U1.6
  Bottom 0.635: JP32.2 48.25,64.56 45.75,64.56 R4.1 45.75,64.81 43.25,67.31 U1.6
P
  Top 3: X1.1 8.66,18.67 12.88,18.67 13.84,19.64 13.84,35.91 6.56,43.2 U$1.P$3 7.62,41.91 13.34,36.2
P1  (via drill 0.35)
  Top 2: v8.26,31.75 8.26,24.76 6.99,26.04 v6.99,31.75 | v5.71,31.75 5.71,24.76 4.45,26.04 v4.45,31.75 | v8.26,29.84 8.26,28.64 U$1.P$4
  Bottom 2: 9.84,23.81 19.68,13.97 19.68,9.53 19.05,8.89 19.05,7.62 | 19.05,7.62 19.05,7.39 | v5.71,29.84 v4.45,29.84 v4.45,31.75 | v5.71,29.84 v6.99,29.84 | v6.99,29.84 6.99,31.11 v8.26,29.84 8.26,24.13 8.57,23.81 9.84,23.81 | v6.99,31.75 v6.99,29.84 | v5.71,31.75 v5.71,29.84 | 19.05,7.62 Q1.2 | v8.26,31.75 8.26,25.4 9.84,23.81
P2
  Bottom 2: 64,50.31 64,51.06 65,52.06 66,52.06 C2.1 | 64,50.31 65,49.31 66.5,49.31 U4.1 | 21.75,50.81 20.5,52.06 C21.1 | 21.75,50.81 21.75,34.06 20,32.31 L1.3 | 64,50.31 63.25,49.81 45.25,49.81 40.25,44.81 28,44.81 22.5,50.31 21.75,50.81
RX0_64
  Top 0.635: JP2.18 88,12.81 90,14.81 90,16.31 91,17.31 92.5,17.31 JP33.2
SCL1_12  (via drill 0.35)
  Top 0.635: J3.2 66.5,74.81 63,71.31 63,60.81 64,59.81 JP3.2 64.5,59.81 67.5,59.81 JP4.2 68,59.81 69.5,61.31 71,61.31 72.5,59.81 | 72.5,59.81 75.5,59.81 JP6.2 76,59.81 78,61.81 79.5,61.81 | 72.5,59.81 72,59.81 JP5.2 72.5,59.81 | 79.5,60.31 79.5,59.81 JP7.2 79.5,60.31 | 79.5,60.31 79.5,61.81 | 79.5,61.81 79.5,72.81 81.5,74.81 J1.2 | v82,40.81 81,41.81 81,55.81 81.5,56.31 81.5,58.31 79.5,60.31
  Bottom 0.635: JP2.21 85,7.81 82,10.81 82,38.31 83,39.31 83,39.81 v82,40.81
SDA1_11
  Top 0.635: JP6.1 75.5,57.31 72,57.31 JP5.1 71.5,57.31 68,57.31 JP4.1 67.5,57.31 64.5,57.31 JP3.1 64,57.31 63,57.31 60,60.31 60,72.81 64.5,77.31 65,77.31 J3.3 65.5,77.31 67.5,79.31 79,79.31 80.5,77.81 J1.3
  Bottom 0.635: 81,52.06 81,55.31 79.25,57.06 JP7.1 | 81,52.06 81,9.31 85,5.31 JP2.23 | JP6.1 75.75,57.06 80.75,52.06 81,52.06
TX0_65
  Bottom 0.635: JP2.20 88,10.31 88,10.81 92.5,15.31 JP33.3

## Text on the board
tPlace: M1 | M1 | M1 | M2 | M2 | M2 | GND | M3 | M3 | M3 | +3.3 | SCL | SDA | + | GND | +